# EAGLE board ruido_v2_main (EAGLE 5.06)
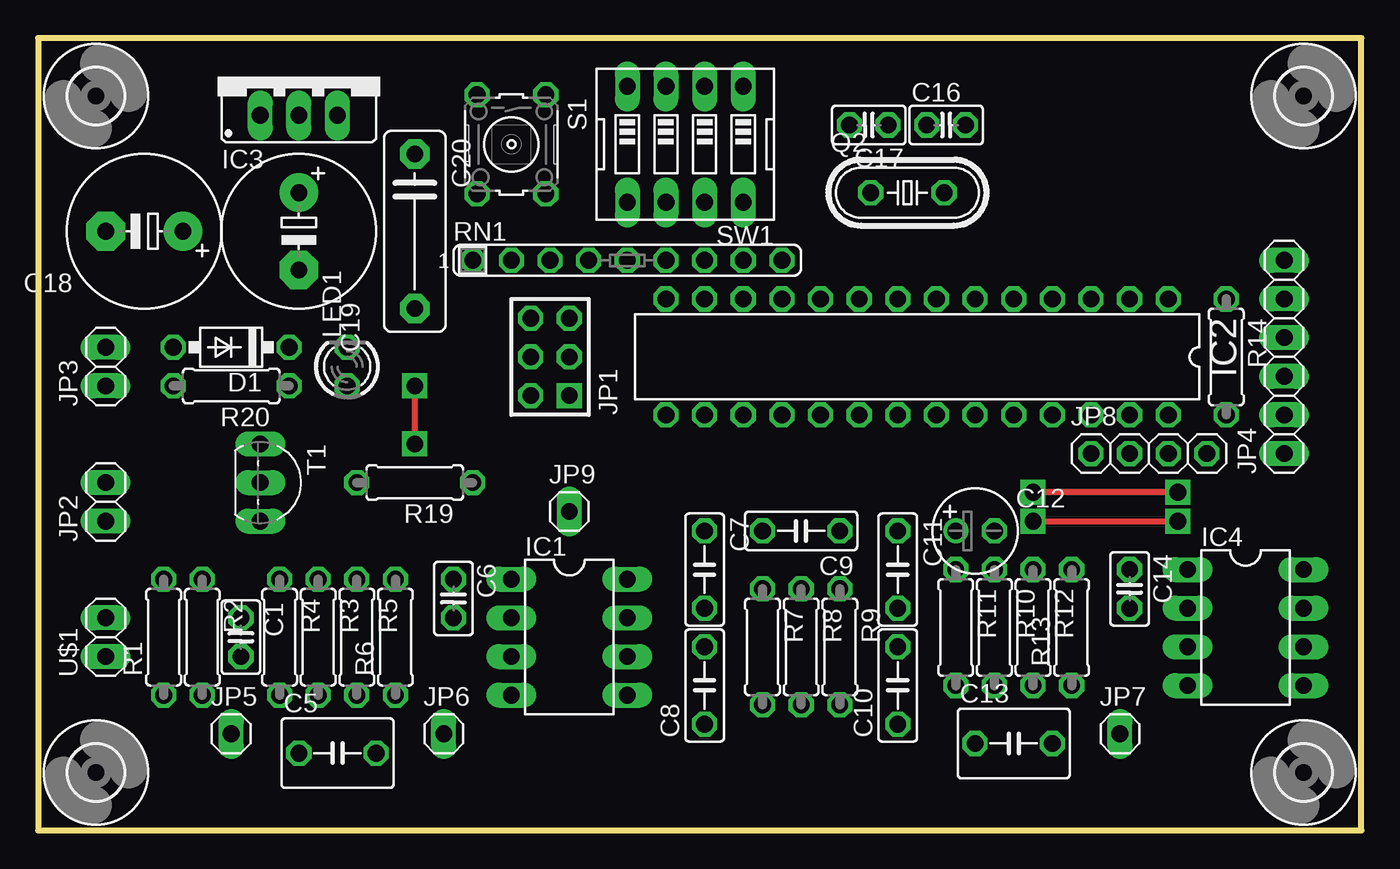
[diagram p0: board, top side]
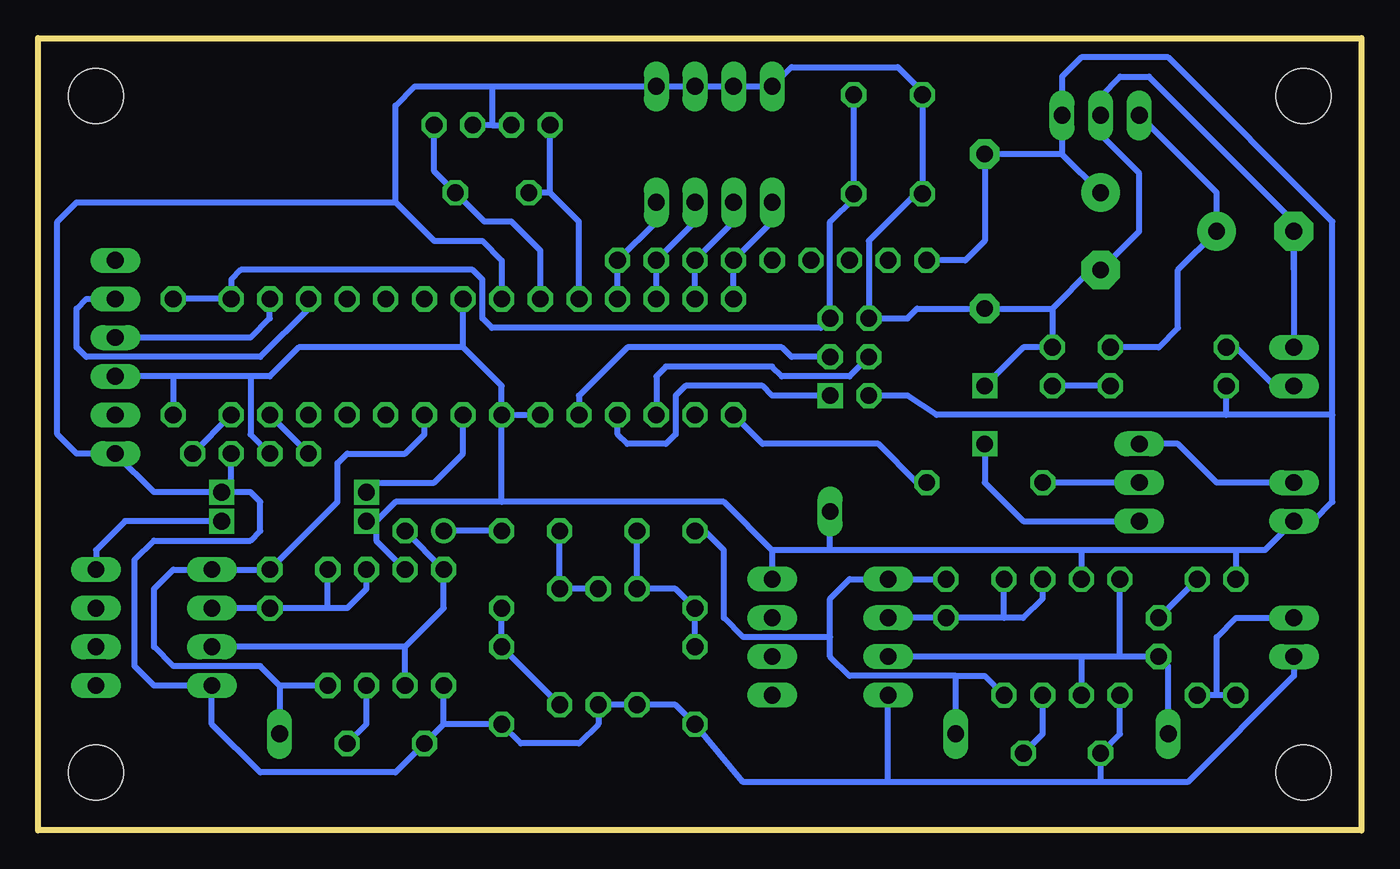
[diagram p1: board, bottom side, seen from below]

Size 87 x 52.07 mm. Coordinates in mm from the lower left corner, seen from the top.
Outline: 0,0 87,0 87,52.07 0,52.07 0,0
Copper layers (1*16): Top 0.035mm / dielectric 1.5mm / Bottom 0.035mm
Design rules "default": minimum track width 10mil, minimum drill 24mil, track to track 8mil, track to pad 8mil, pad to pad 8mil, via to via 8mil, smd to smd 8mil, copper to edge 40mil, drill to drill 8mil, minimum pad ring 10mil, minimum via ring 8mil, stop-mask expansion 4mil, vias tented up to drill 0mil, thermal gap 10mil

## Footprints (pad centres in the part's own frame; a part is rotated, then mirrored left to right if it is on the bottom)
C025-025X050 = drill 1.1 octagon: 1 -1.27,0; 2 1.27,0
C050-045X075 = drill 1.1 octagon: 1 -2.54,0; 2 2.54,0
C050-025X075 = drill 1.1 octagon: 1 -2.54,0; 2 2.54,0
E2,5-6 = drill 1.1 round: + -1.27,0 | drill 1.1 pad 1.6 octagon: - 1.27,0
E5-10,5 = drill 1.1 pad 2.54 round: + -2.54,0 | drill 1.1 pad 2.54 octagon: - 2.54,0
C102-043X133 = drill 1.1 pad 1.93 octagon: 1 -5.08,0; 2 5.08,0
DO41-7 = drill 1.1 octagon: A 3.81,0; C -3.81,0
DIL08 = drill 1.1 long: 1 -3.81,-3.81; 2 -1.27,-3.81; 3 1.27,-3.81; 4 3.81,-3.81; 5 3.81,3.81; 6 1.27,3.81; 7 -1.27,3.81; 8 -3.81,3.81
DIL28-3 = drill 1.1 octagon: 1 -16.51,-3.81; 2 -13.97,-3.81; 3 -11.43,-3.81; 4 -8.89,-3.81; 5 -6.35,-3.81; 6 -3.81,-3.81; 7 -1.27,-3.81; 8 1.27,-3.81; 9 3.81,-3.81; 10 6.35,-3.81; 11 8.89,-3.81; 12 11.43,-3.81; 13 13.97,-3.81; 14 16.51,-3.81; 15 16.51,3.81; 16 13.97,3.81; 17 11.43,3.81; 18 8.89,3.81; 19 6.35,3.81; 20 3.81,3.81; 21 1.27,3.81; 22 -1.27,3.81; 23 -3.81,3.81; 24 -6.35,3.81; 25 -8.89,3.81; 26 -11.43,3.81; 27 -13.97,3.81; 28 -16.51,3.81
78XXS = drill 1.1 long: GND 0,-2.54; IN -2.54,-2.54; OUT 2.54,-2.54
AVR-ISP-6 = drill 1.1 square: 1 -2.54,-1.27 | drill 1.1 octagon: 2 -2.54,1.27; 3 0,-1.27; 4 0,1.27; 5 2.54,-1.27; 6 2.54,1.27
1X02 = drill 1.1 long: 1 -1.27,0; 2 1.27,0
1X06 = drill 1.1 long: 1 -6.35,0; 2 -3.81,0; 3 -1.27,0; 4 1.27,0; 5 3.81,0; 6 6.35,0
1X01 = drill 1.1 long: 1 0,0
1X04 = drill 1.1 octagon: 1 -3.81,0; 2 -1.27,0; 3 1.27,0; 4 3.81,0
LED3MM = drill 1.1 octagon: A -1.27,0; K 1.27,0
HC49/S = drill 1.1 octagon: 1 -2.413,0; 2 2.413,0
0207/7 = drill 1.1 octagon: 1 -3.81,0; 2 3.81,0
SIL9 = drill 1.1 octagon: 1 -10.16,0; 2 -7.62,0; 3 -5.08,0; 4 -2.54,0; 5 0,0; 6 2.54,0; 7 5.08,0; 8 7.62,0; 9 10.16,0
B3F-10XX = drill 1.1 octagon: 1 -3.251,2.261; 2 3.251,2.261; 3 -3.251,-2.261; 4 3.251,-2.261
EDG-04 = drill 1.1 long: 1 -3.81,-3.81; 2 -1.27,-3.81; 3 1.27,-3.81; 4 3.81,-3.81; 5 3.81,3.81; 6 1.27,3.81; 7 -1.27,3.81; 8 -3.81,3.81
TO92- = drill 1.1 long: 1 2.54,0; 2 0,0; 3 -2.54,0
3,6 = hole 3.6: 0,0

## Placement (x,y rotation side)
C1  100nF  [C025-025X050]  13.34,12.7 270 top
C5  10nF  [C050-045X075]  19.68,5.08 0 top
C6  10pF  [C025-025X050]  27.3,15.24 270 top
C7  220nF  [C050-025X075]  43.81,17.14 270 top
C8  27nF  [C050-025X075]  43.81,9.53 90 top
C9  330nF  [C050-025X075]  50.16,19.68 180 top
C10  1.8nF  [C050-025X075]  56.52,9.53 90 top
C11  47nF  [C050-025X075]  56.52,17.14 270 top
C12  100uF/16v  [E2,5-6]  61.59,19.68 0 top
C13  10nF  [C050-045X075]  64.14,5.71 0 top
C14  10pF  [C025-025X050]  71.75,15.88 270 top
C16  0.1uF  [C025-025X050]  59.69,46.35 0 top
C17  0.1uF  [C025-025X050]  54.61,46.35 180 top
C18  220uF/63V  [E5-10,5]  6.99,39.37 180 top
C19  220uF/63V  [E5-10,5]  17.14,39.37 270 top
C20  0.1uF/250V  [C102-043X133]  24.77,39.37 270 top
D1  1N4001  [DO41-7]  12.7,31.75 180 top
IC1  LM358N  [DIL08]  34.92,12.7 270 top
IC2  MEGA8-P  [DIL28-3]  57.78,31.11 180 top
IC3  7805  [78XXS]  17.14,49.53 0 top
IC4  LM358N  [DIL08]  79.38,13.34 270 top
JP1  AVR-ISP-6  [AVR-ISP-6]  33.66,31.11 90 top
JP2  [1X02]  4.45,21.59 90 top
JP3  [1X02]  4.45,30.48 90 top
JP4  [1X06]  81.92,31.11 90 top
JP5  [1X01]  12.7,6.35 0 top
JP6  [1X01]  26.67,6.35 0 top
JP7  [1X01]  71.12,6.35 0 top
JP8  [1X04]  73.03,24.77 0 top
JP9  [1X01]  34.92,20.95 0 top
LED1  [LED3MM]  20.32,30.48 90 top
Q2  [HC49/S]  57.15,41.91 0 top
R1  2k2  [0207/7]  8.26,12.7 90 top
R2  330  [0207/7]  10.79,12.7 270 top
R3  100k  [0207/7]  18.41,12.7 270 top
R4  100k  [0207/7]  15.88,12.7 270 top
R5  1k  [0207/7]  20.95,12.7 270 top
R6  1M5  [0207/7]  23.5,12.7 90 top
R7  1k8  [0207/7]  47.62,12.06 270 top
R8  1k8  [0207/7]  50.16,12.06 270 top
R9  10k  [0207/7]  52.7,12.06 270 top
R10  100k  [0207/7]  62.87,13.34 270 top
R11  100k  [0207/7]  60.33,13.34 270 top
R12  1k  [0207/7]  65.41,13.34 270 top
R13  10k  [0207/7]  67.94,13.34 90 top
R14  10 K  [0207/7]  78.11,31.11 270 top
R19  560  [0207/7]  24.77,22.86 180 top
R20  1 K  [0207/7]  12.7,29.21 180 top
RN1  [SIL9]  38.73,37.47 0 top
S1  [B3F-10XX]  31.11,45.09 270 top
SW1  [EDG-04]  42.55,45.09 180 top
T1  BC547  [TO92-]  14.61,22.86 270 top
U$1  MIC  [1X02]  4.45,12.7 90 top
U$2  [3,6]  3.81,3.81 0 top
U$3  [3,6]  83.19,3.81 0 top
U$4  [3,6]  83.19,48.26 0 top
U$5  [3,6]  3.81,48.26 0 top

## Library data of the parts
C1 C5-C14 C16-C20 D1 IC1-IC4 JP1-JP9 LED1 Q2 R1-R14 R19 R20 RN1 S1 SW1 T1 U$1-U$5 = ruido

## Nets
+5V: C19.+ C20.1 IC1.8 IC2.7 IC2.20 IC2.21 IC3.OUT IC4.8 JP1.2 JP2.1 JP4.3 JP8.2 JP9.1 R1.2 R3.1 R10.1 R14.2 R20.2 RN1.1
GND: C5.1 C8.1 C10.1 C13.1 C16.1 C17.1 C18.- C19.- C20.2 IC1.4 IC2.8 IC2.22 IC3.GND IC4.4 JP1.6 JP3.2 JP4.1 JP8.3 LED1.K R4.2 R7.2 R8.2 R11.2 S1.3 S1.4 SW1.1 SW1.2 SW1.3 SW1.4 T1.1 U$1.1
MISO: IC2.18 JP1.1
MOSI: IC2.17 JP1.4
N$1: R1.1 R2.2 U$1.2
N$2: C1.1 R2.1
N$3: C7.2 C8.2 C9.2 R7.1
N$4: C11.1 C12.+
N$5: C1.2 IC1.3 JP5.1 R3.2 R4.1
N$6: C9.1 R8.1 R9.1
N$7: C10.2 C11.2 R9.2
N$8: C12.- IC4.3 R10.2 R11.1
N$9: C13.2 R12.2
N$10: C14.2 IC4.2 R12.1 R13.2
N$11: R19.2 T1.2
N$12: C5.2 R5.2
N$13: C6.2 IC1.2 R5.1 R6.2
N$14: C6.1 C7.1 IC1.1 JP6.1 R6.1
N$15: IC2.14 RN1.6 SW1.5
N$16: IC2.27 JP8.1
N$17: IC2.28 JP8.4
N$18: C16.2 IC2.9 Q2.2
N$19: C17.2 IC2.10 Q2.1
N$22: IC2.13 RN1.7 SW1.6
N$23: IC2.12 RN1.8 SW1.7
N$24: IC2.11 RN1.9 SW1.8
N$30: LED1.A R20.1
N$34: JP2.2 T1.3
N$37: D1.A JP3.1
N$38: C18.+ D1.C IC3.IN
PWM: IC2.15 R19.1
RST: IC2.1 JP1.5 R14.1 S1.1 S1.2
RXD: IC2.2 JP4.4
SCK: IC2.19 JP1.3
SIG: C14.1 IC2.23 IC4.1 JP7.1 R13.1
TXD: IC2.3 JP4.5

## Tracks (layer width: path | path; a pad name or v marks a point on that pad's centre or on a via)
+5V  (via drill 1.1)
  Top 0.406: v65.41,20.32 v74.93,20.32
  Bottom 0.406: 38.73,18.41 IC1.8 | 8.26,18.41 18.41,18.41 | 18.41,18.41 34.92,18.41 | 34.92,18.41 38.73,18.41 | 56.52,21.59 41.91,21.59 38.73,18.41 | 18.41,18.41 R3.1 | IC2.21 IC2.20 | IC2.21 56.52,29.21 59.05,31.75 | 1.91,27.3 8.89,27.3 | 8.89,27.3 27.94,27.3 29.84,28.57 JP1.2 | 1.91,27.3 1.91,40.01 12.7,50.8 18.41,50.8 19.68,49.53 IC3.OUT 19.68,44.45 | 59.05,31.75 IC2.7 | 78.11,29.84 R14.2 | 78.11,29.84 JP4.3 | 8.26,18.41 R1.2 | 56.52,21.59 IC2.21 | 1.91,27.3 1.91,21.59 3.17,20.32 JP2.1 6.35,18.41 8.26,18.41 | 19.68,44.45 C20.1 24.77,38.73 26.04,37.47 RN1.1 | 8.89,27.3 R20.2 | 19.68,44.45 C19.+ | IC4.8 83.19,18.41 81.28,20.32 v74.93,20.32 | 59.05,31.75 69.85,31.75 71.75,29.84 73.03,29.84 | 73.03,29.84 78.11,29.84 | R10.1 64.77,19.05 64.77,20.32 | 56.52,21.59 63.5,21.59 64.77,20.32 | 34.92,18.41 JP9.1 | 64.77,20.32 v65.41,20.32 | JP8.2 73.03,26.04 73.03,29.84
GND  (via drill 1.1)
  Top 0.406: v24.77,29.21 v24.77,25.4 | v74.93,22.23 v65.41,22.23
  Bottom 0.406: R4.2 15.88,6.35 C5.1 17.14,3.17 | 31.11,3.17 IC1.4 | 31.11,3.17 40.64,3.17 C8.1 45.09,8.26 R7.2 R8.2 50.16,6.99 51.44,5.71 55.24,5.71 C10.1 60.33,6.99 | 60.33,6.99 C13.1 63.5,3.81 72.39,3.81 75.56,6.99 IC4.4 79.38,9.53 80.64,10.79 80.64,17.78 79.38,19.05 73.03,19.05 72.39,19.68 72.39,21.59 73.03,22.23 74.3,22.23 | 60.33,6.99 R11.2 | T1.1 22.23,20.32 24.77,22.86 v24.77,25.4 | 57.15,48.9 SW1.1 SW1.2 SW1.3 SW1.4 37.47,50.16 30.48,50.16 28.85,48.54 S1.3 S1.4 29.29,41.83 32.38,38.73 JP1.6 29.84,33.66 29.21,34.29 C20.2 20.32,34.29 | 57.15,46.35 C17.1 | 57.15,46.35 C16.1 | IC2.8 56.52,37.47 57.78,38.73 60.96,38.73 63.5,41.27 | 63.5,41.27 63.5,47.62 62.23,48.9 57.15,48.9 | U$1.1 4.45,10.16 11.43,3.17 17.14,3.17 | 4.45,36.83 JP3.2 | 4.45,36.83 4.45,40.01 13.97,49.53 15.88,49.53 17.14,48.26 IC3.GND 17.14,45.72 14.61,43.18 14.61,39.37 C19.- 17.78,36.83 20.32,34.29 | IC2.22 59.05,24.77 60.96,22.86 64.77,22.86 v65.41,22.23 | 4.45,36.83 C18.- | 57.15,48.9 57.15,46.35 | 74.3,22.23 v74.93,22.23 79.38,22.23 JP4.1 84.45,24.77 85.72,26.04 85.72,40.01 84.45,41.27 63.5,41.27 | v24.77,29.21 22.23,31.75 LED1.K 20.32,34.29 | 17.14,3.17 31.11,3.17 | 74.3,22.23 JP8.3
MISO
  Bottom 0.406: IC2.18 48.9,26.04 48.26,25.4 45.72,25.4 45.09,26.04 45.09,28.57 44.45,29.21 39.37,29.21 38.73,28.57 JP1.1
MOSI
  Bottom 0.406: JP1.4 33.66,29.84 38.1,29.84 38.73,30.48 45.72,30.48 46.35,29.84 IC2.17
N$1
  Bottom 0.406: R1.1 9.53,8.89 | 9.53,8.89 R2.2 | U$1.2 8.26,13.97 9.53,12.7 9.53,8.89
N$2
  Bottom 0.406: C1.1 R2.1
N$3
  Bottom 0.406: C9.2 R7.1 45.09,15.88 C7.2 C8.2
N$4
  Bottom 0.406: C11.1 C12.+
N$5
  Bottom 0.406: 15.88,11.43 C1.2 12.7,10.79 JP5.1 | 15.88,11.43 18.41,11.43 | 18.41,11.43 IC1.3 | 15.88,11.43 R4.1 | 18.41,11.43 R3.2
N$6
  Bottom 0.406: C9.1 R9.1 R8.1
N$7
  Bottom 0.406: R9.2 C10.2 C11.2
N$8
  Bottom 0.406: 62.87,12.06 60.33,14.61 R11.1 C12.- | R10.2 62.87,12.06 | 62.87,12.06 IC4.3
N$9
  Bottom 0.406: R12.2 65.41,6.99 C13.2
N$10
  Bottom 0.406: IC4.2 C14.2 67.94,14.61 | R12.1 65.41,15.88 66.67,14.61 67.94,14.61 | 67.94,14.61 R13.2
N$11
  Bottom 0.406: T1.2 R19.2
N$12
  Bottom 0.406: R5.2 20.95,6.35 C5.2
N$13
  Bottom 0.406: IC1.2 C6.2 23.5,13.97 | 23.5,13.97 22.23,13.97 20.95,15.24 R5.1 | 23.5,13.97 R6.2
N$14
  Bottom 0.406: C6.1 IC1.1 33.66,16.51 34.92,15.24 34.92,12.7 | R6.1 24.77,10.16 26.67,10.16 | C7.1 43.18,19.68 41.91,18.41 41.91,13.97 40.64,12.7 34.92,12.7 | 26.67,10.16 33.66,10.16 34.92,11.43 34.92,12.7 | JP6.1 26.67,10.16
N$15
  Bottom 0.406: IC2.14 RN1.6 38.73,40.01 SW1.5
N$16
  Bottom 0.406: JP8.1 IC2.27
N$17
  Bottom 0.406: IC2.28 JP8.4
N$18
  Bottom 0.406: IC2.9 53.98,38.1 55.88,40.01 57.66,40.01 Q2.2 60.96,43.31 C16.2
N$19
  Bottom 0.406: IC2.10 51.44,40.01 53.34,41.91 | 53.34,41.91 Q2.1 | 53.34,41.91 C17.2
N$22
  Bottom 0.406: IC2.13 RN1.7 41.27,40.01 SW1.6
N$23
  Bottom 0.406: IC2.12 RN1.8 43.81,40.01 SW1.7
N$24
  Bottom 0.406: IC2.11 RN1.9 46.35,40.01 SW1.8
N$30
  Bottom 0.406: R20.1 LED1.A
N$34
  Bottom 0.406: JP2.2 9.53,22.86 12.06,25.4 T1.3
N$37
  Bottom 0.406: JP3.1 5.71,29.21 8.26,31.75 D1.A
N$38
  Bottom 0.406: D1.C 13.34,31.75 12.06,33.02 12.06,36.83 C18.+ 9.53,41.91 IC3.IN
PWM
  Bottom 0.406: R19.1 29.21,22.86 31.75,25.4 39.37,25.4 IC2.15
RST
  Bottom 0.406: R14.1 IC2.1 74.3,36.2 73.66,36.83 58.42,36.83 57.78,36.2 57.78,33.66 57.15,33.02 35.56,33.02 JP1.5 34.92,40.01 33.38,41.55 S1.2 S1.1
RXD
  Bottom 0.406: IC2.2 71.75,33.66 73.03,32.38 JP4.4
SCK
  Bottom 0.406: IC2.19 51.44,28.57 48.26,31.75 38.1,31.75 37.47,31.11 JP1.3
SIG
  Bottom 0.406: R13.1 71.12,9.53 | 71.12,9.53 72.39,10.79 78.11,10.79 79.38,12.06 79.38,15.88 78.11,17.14 IC4.1 C14.1 67.31,21.59 67.31,24.13 66.67,24.77 62.87,24.77 61.59,26.04 IC2.23 | 71.12,9.53 JP7.1
TXD
  Bottom 0.406: IC2.3 69.22,34.29 72.39,31.11 83.82,31.11 84.45,31.75 84.45,34.29 83.82,34.92 JP4.5